# EAGLE board RGB LED Board -- Single (EAGLE 6.4)
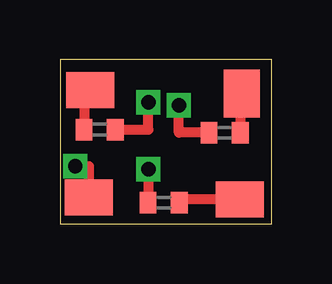
[diagram p0: board, top side]
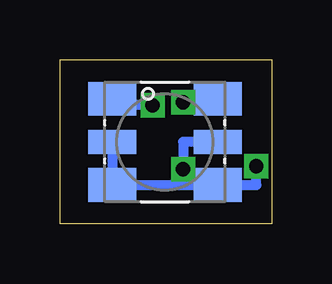
[diagram p1: board, bottom side, seen from below]

Size 8.81 x 6.85 mm. Coordinates in mm from the lower left corner, seen from the top.
Outline: 0,0 8.81,0 8.81,6.85 0,6.85 0,0
Copper layers (1*16): Top 0.035mm / dielectric 1.5mm / Bottom 0.035mm
Design rules "default": minimum track width 10mil, minimum drill 24mil, track to track 8mil, track to pad 8mil, pad to pad 8mil, via to via 8mil, smd to smd 8mil, copper to edge 40mil, drill to drill 8mil, minimum pad ring 10mil, minimum via ring 8mil, stop-mask expansion 4mil, vias tented up to drill 0mil, thermal gap 10mil

## Footprints (pad centres in the part's own frame; a part is rotated, then mirrored left to right if it is on the bottom)
PAD-1.5X4.5 = smd 1.5 x 2: P$1 0,0
LED-TRICOLOR-5050 = smd 2 x 1.4: 1 2.2,1.8; 2 -2.2,1.8; 5 2.2,-1.8; 6 -2.2,-1.8 | smd 2 x 1: 3 2.2,0; 4 -2.2,0
R0402 = smd 0.7 x 0.9: 1 -0.65,0; 2 0.65,0

## Placement (x,y rotation side)
JP1  M01SMD-4.5X1.5  [PAD-1.5X4.5]  7.58,5.44 0 top
JP2  M01SMD-4.5X1.5  [PAD-1.5X4.5]  1.21,1.11 270 top
JP3  M01SMD-4.5X1.5  [PAD-1.5X4.5]  1.27,5.59 90 top
JP4  M01SMD-4.5X1.5  [PAD-1.5X4.5]  7.49,1.02 90 top
LED2  LED-TRICOLOR-5050  [LED-TRICOLOR-5050]  4.45,3.43 0 bottom
R2  [R0402]  6.86,3.81 180 top
R3  [R0402]  1.65,3.94 0 top
R4  [R0402]  4.32,0.89 180 top

## Library data of the parts
JP1-JP4 LED2 = SparkFun
R2-R4 = resistor

## Nets
N$1: LED2.2 R2.2
N$3: LED2.1 R3.2
N$5: LED2.3 R4.2
N$6: JP2.P$1 LED2.4 LED2.5 LED2.6
N$9: JP1.P$1 R2.1
N$10: JP3.P$1 R3.1
N$11: JP4.P$1 R4.1

## Tracks (layer width: path | path; a pad name or v marks a point on that pad's centre or on a via)
N$1  (via drill 0.6)
  Top 0.406: R2.2 4.95,3.81 v4.95,4.95
  Bottom 0.406: v4.95,4.95 6.64,4.95 LED2.2
N$3  (via drill 0.6)
  Top 0.406: R3.2 3.68,3.94 v3.68,5.08
  Bottom 0.406: v3.68,5.08 2.25,5.08 LED2.1
N$5  (via drill 0.6)
  Top 0.406: v3.68,2.29 3.67,2.29 R4.2
  Bottom 0.406: LED2.3 3.68,3.43 v3.68,2.29
N$6  (via drill 0.6)
  Top 0.406: v0.64,2.41 1.21,2.41 JP2.P$1
  Bottom 0.406: LED2.4 LED2.6 LED2.5 0.64,1.63 v0.64,2.41
N$9
  Top 0.406: JP1.P$1 7.51,5.44 R2.1
N$10
  Top 0.406: JP3.P$1 1,5.59 R3.1
N$11
  Top 0.406: JP4.P$1 4.97,1.02 R4.1